# Altium PCB Memory_Expansion_Daughter_Board.PcbDoc
Units mm, origin at the board's own origin, x right, y up, seen from the top; angles counter-clockwise.
Board outline 63.5 x 43.5 mm, 2 copper layers (Top Layer, Bottom Layer), stack 1.671 mm thick; 45 components, 30 nets, 135 pads, 49 vias.
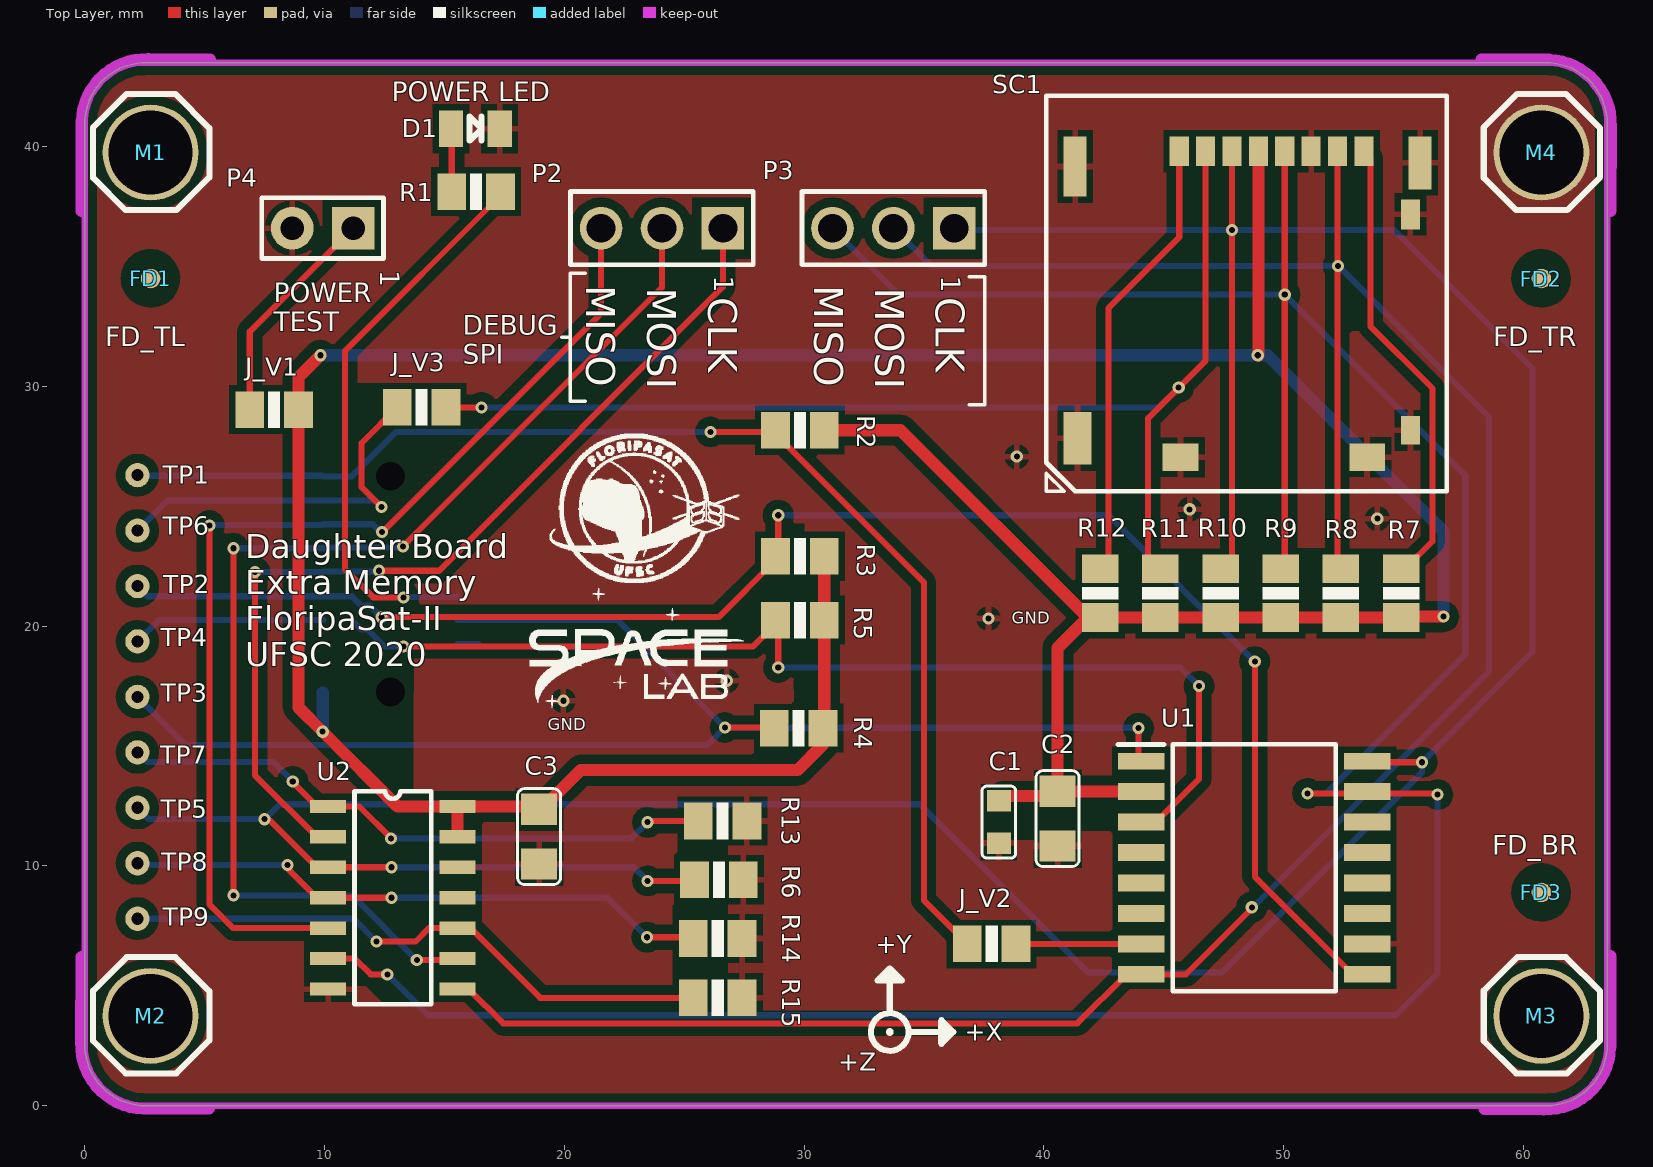
[diagram p0: Top Layer view]
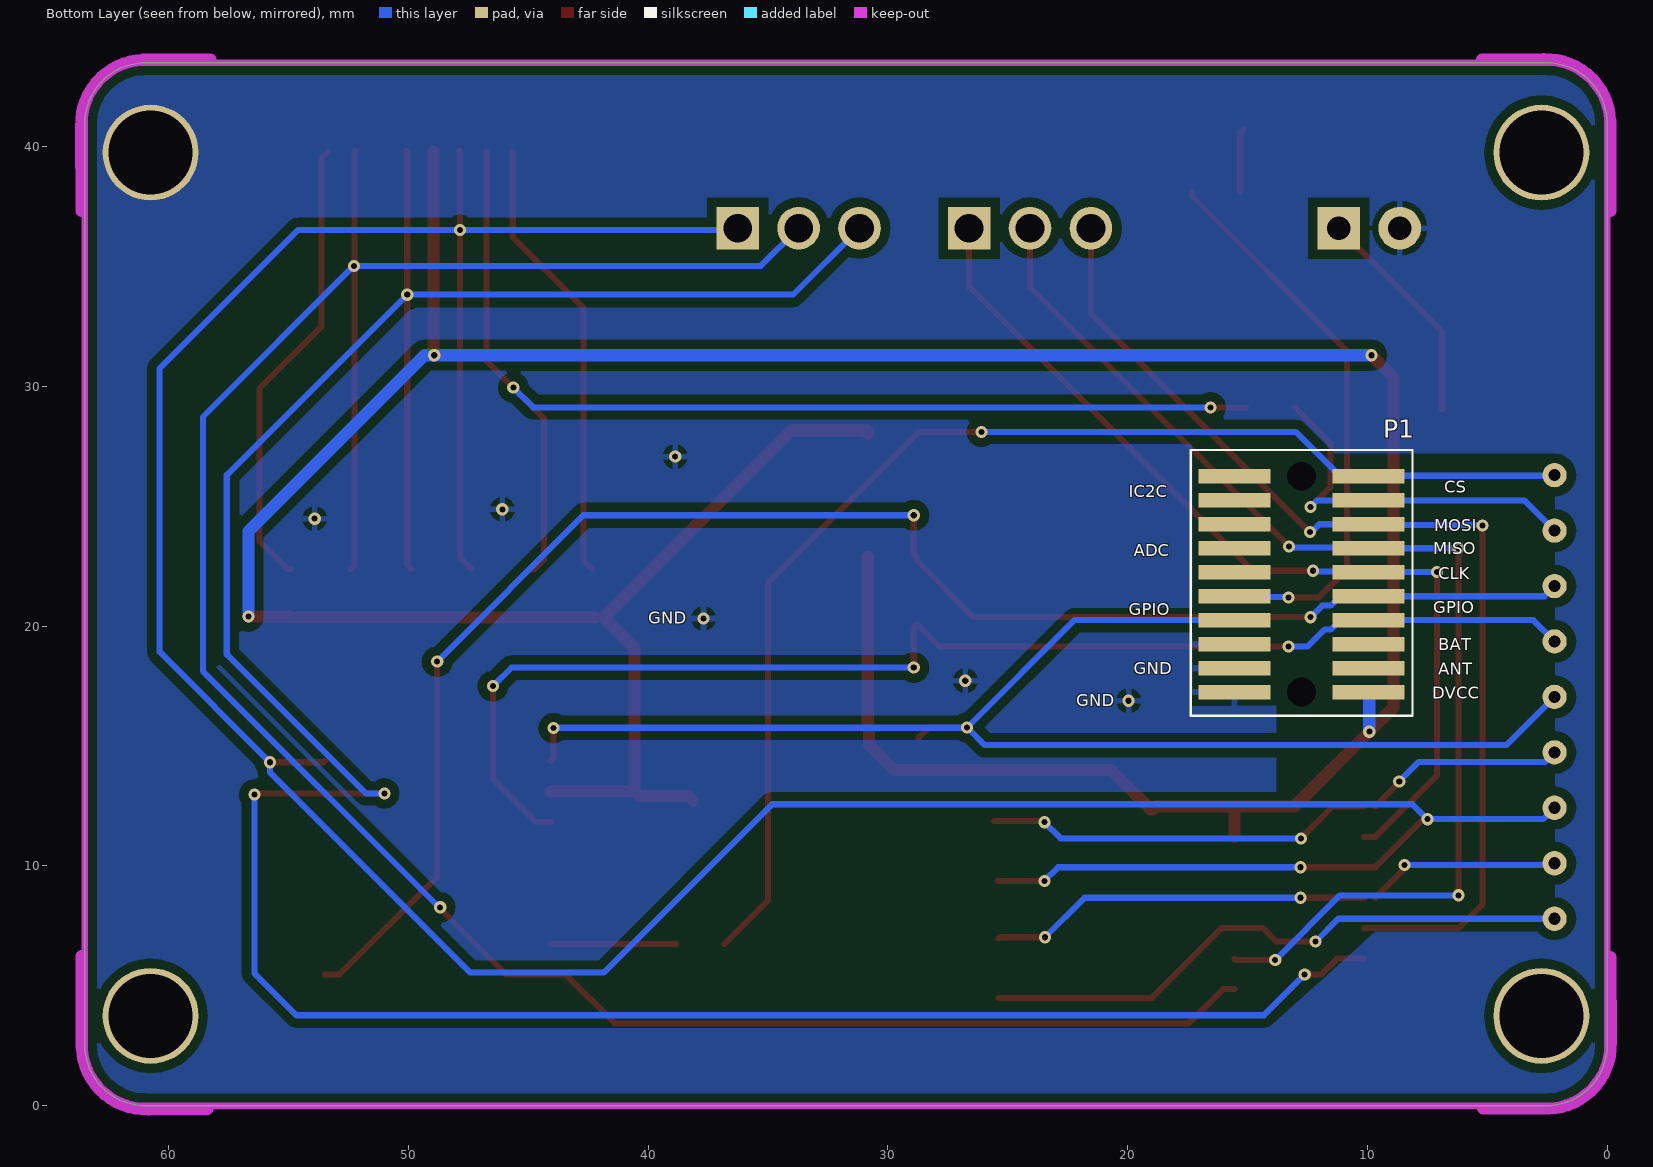
[diagram p1: Bottom Layer view, seen from below]
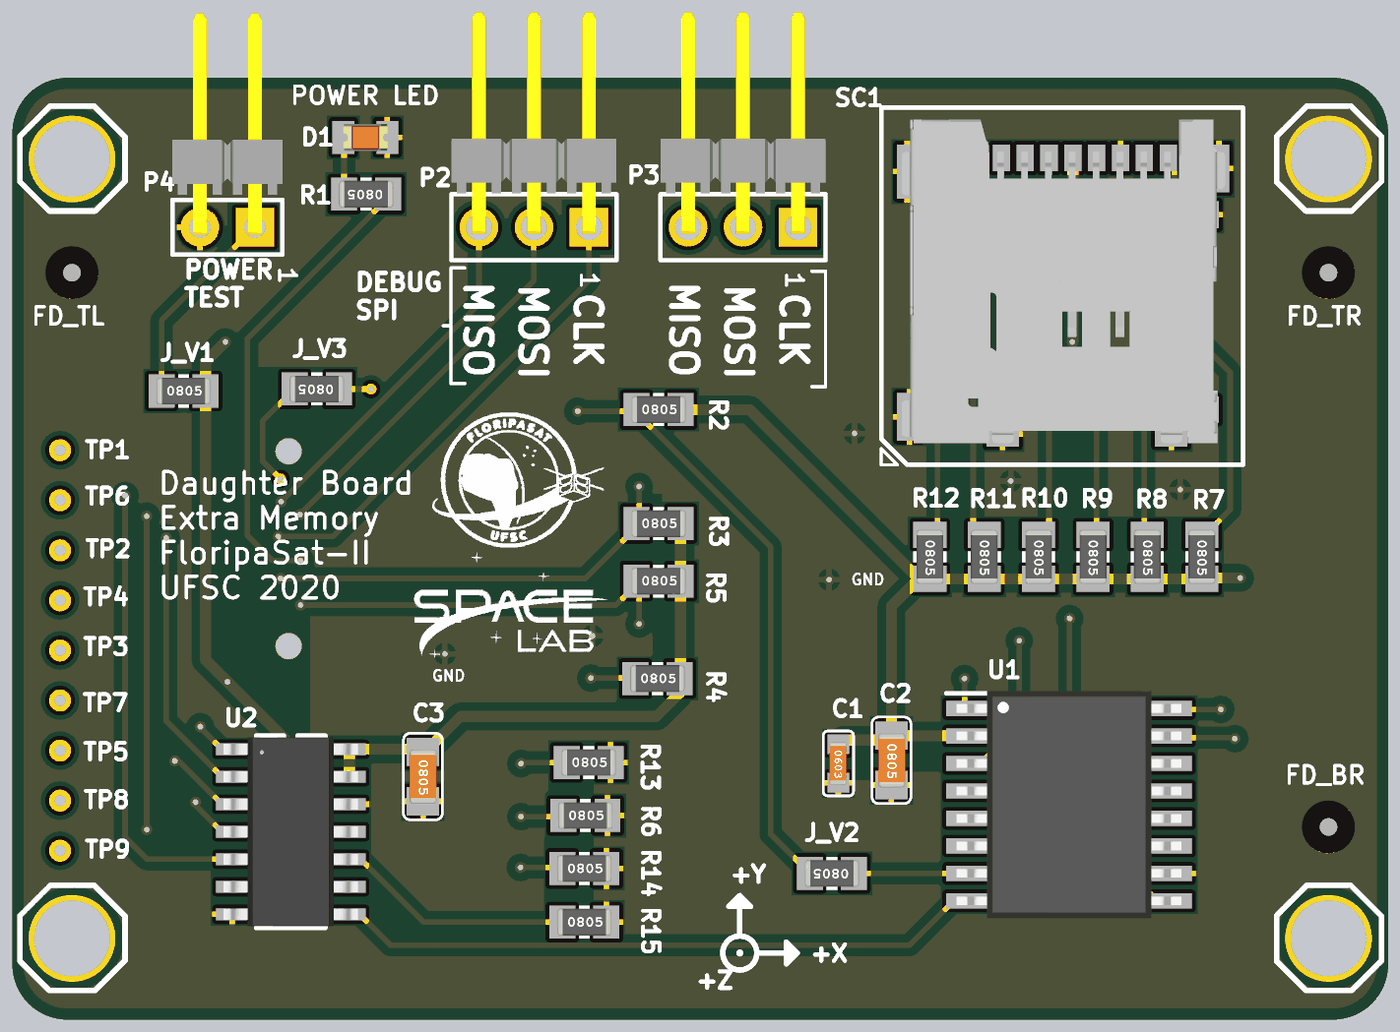
[diagram p2: 3D render of the assembled board from above, using the file's embedded part models]

## Layer stack, top to bottom
Top Solder: solder mask 0.0102, Solder Resist, Dk 3.5
Top Layer: signal copper 0.0356
Dielectric 1: dielectric 1.6, FR-4, Dk 4.8
Bottom Layer: signal copper 0.0356
Bottom Solder: solder mask 0.0102, Solder Resist, Dk 3.5

## Board outline
2.54,0 cw(c2.54,2.54) 0,2.54 0,2.8 0,40.85 0,40.96 cw(c2.54,40.96) 2.54,43.5 2.65,43.5 60.7,43.5 60.96,43.5 cw(c60.96,40.96) 63.5,40.96 63.5,40.7 63.5,2.8 63.5,2.54 cw(c60.96,2.54) 60.96,0

## Design rules (kind name [scope] priority, off if disabled: settings)
Clearance Clearance_1 [(ObjectKind = 'Pad') And (AsMM(X1) = 60.75) And (AsMM(Y1) = 39.75)] p1: gap=0.254 ignorepadtopadclearanceinfootprint=FALSE except(0: Arc-Hole Track-Hole SMDPad-Hole THPad-Hole Via-Hole Fill-Hole Poly-Hole Region-Hole Text-Hole)
Clearance Clearance_6 [InNet('GND')] p2: gap=0.381 ignorepadtopadclearanceinfootprint=FALSE except(0: Arc-Hole Track-Hole SMDPad-Hole THPad-Hole Via-Hole Fill-Hole Poly-Hole Region-Hole Text-Hole; 0.152: THPad-THPad; 0.178: Arc-SMDPad Arc-THPad Track-SMDPad Track-THPad SMDPad-SMDPad; 0.254: SMDPad-Fill SMDPad-Poly SMDPad-Region; 0.508: Arc-Arc Arc-Track Arc-Text Track-Track Track-Text SMDPad-Text Fill-Fill Fill-Poly Fill-Region Fill-Text Poly-Poly Poly-Region Poly-Text Region-Region Region-Text Text-Text)
Clearance [All] p3: gap=0.178 ignorepadtopadclearanceinfootprint=FALSE except(0: Arc-Hole Track-Hole SMDPad-Hole THPad-Hole Via-Hole Fill-Hole Poly-Hole Region-Hole Text-Hole)
DiffPairsRouting DiffPairsRouting_1 [InDifferentialPair('XT2')] p1: maxlimit=0.254 minlimit=0.254 mostfreqgap=0.254 toplayer_minwidth=0.254 toplayer_maxwidth=0.254 toplayer_prefwidth=0.254 bottomlayer_minwidth=0.254 bottomlayer_maxwidth=0.254 bottomlayer_prefwidth=0.254 maxuncoupledlength=12.7
DiffPairsRouting [All] p2: maxlimit=0.152 minlimit=0.152 mostfreqgap=0.152 toplayer_minwidth=0.457 toplayer_maxwidth=0.457 toplayer_prefwidth=0.457 bottomlayer_minwidth=0.457 bottomlayer_maxwidth=0.457 bottomlayer_prefwidth=0.457 maxuncoupledlength=12.7
HoleSize [All] p1: absolutevalues=TRUE maxlimit=5.08 minlimit=0.025 maxpercent=80.000 minpercent=20.000
MinimumSolderMaskSliver [All] p1: minsoldermaskwidth=0
PlaneConnect [InNetClass('power')] p1: planeconnectstyle=Direct reliefexpansion=0.508 reliefentries=4 reliefconductorwidth=0.254 reliefairgap=0.254
PlaneConnect PlaneConnect_1 [All] p2: planeconnectstyle=Relief reliefexpansion=0.508 reliefentries=4 reliefconductorwidth=0.254 reliefairgap=0.254
PolygonConnect [(ObjectKind = 'Pad') And (Layer = 'MultiLayer') And (Net = 'GND') And (Component = 'M4') And (AsMM(X1) = 60.75) And (AsMM(Y1) = 39.75)] p1: connectstyle=Direct reliefconductorwidth=0.254 reliefentries=4 polygonreliefangle="90 Angle" airgapwidth=0.254
PolygonConnect PolygonConnect_GND_pads [(ObjectKind = 'Pad') And (Net = 'GND')] p2: connectstyle=Relief reliefconductorwidth=0.254 reliefentries=4 polygonreliefangle="90 Angle" airgapwidth=0.254
RoutingVias [All] p1: holewidth=0.254 width=0.508 viastyle="Through Hole" minholewidth=0.127 minwidth=0.254 maxholewidth=0.254 maxwidth=0.635
SilkToSilkClearance [All] p1: silktosilkclearance=0.127
SilkToSolderMaskClearance [IsPad] p1: minsilkscreentomaskgap=0 clearancetoexposedcopper=TRUE
SolderMaskExpansion [All] p1: expansion=0.178
Width Width_Power [InNetClass('Power')] p1: maxlimit=0.762 minlimit=0.508 preferedwidth=0.508
Width [All] p2: maxlimit=1.778 minlimit=0.127 preferedwidth=0.254
24 further rules are at their usual default settings.

## Classes and differential pairs
component class U_3_Communication_Buffers: C3 R13 R14 R15 TP7 TP8 TP9 U2
component class U_2_Non_Volatile_Memories: C1 C2 J_V2 J_V3 R2 R3 R4 R5 R6 R7 R8 R9 R10 R11 R12 SC1 TP1 TP2 TP3 TP4 TP5 TP6 U1
component class 1_Interface: D1 FD1 FD2 FD3 J_V1 M1 M2 M3 M4 P1 P2 P3 P4 R1

## Components (designator, comment, footprint, x,y, rotation, side; value= is the part's Value field where it differs from the comment)
C1 "100nF/50V" C0603_MD 38.125,11.83 r270 top
C2 "4.7uF/25V" C0805_MD 40.575,11.975 r270 top
C3 "0.1uF/25V" C0805_MD 18.95,11.225 r270 top
D1 "Orange" 0805-LED 16.3,40.75 r0 top
FD1 "Fiducial" "FIDUCIAL 1.3MM" 2.75,34.5 r0 top
FD2 "Fiducial" "FIDUCIAL 1.3MM" 60.75,34.5 r0 top
FD3 "Fiducial" "FIDUCIAL 1.3MM" 60.75,8.897 r0 top
J_V1 "0R" 0805 7.899,29.032 r0 top
J_V2 "0R" 0805 37.825,6.75 r180 top
J_V3 "0R" 0805 14.05,29.125 r180 top
M1 "DB Mechanical Hole" "DB MECHANICAL HOLE" 2.75,39.75 r0 top
M2 "DB Mechanical Hole" "DB MECHANICAL HOLE" 2.75,3.75 r0 top
M3 "DB Mechanical Hole" "DB MECHANICAL HOLE" 60.75,3.75 r0 top
M4 "DB Mechanical Hole" "DB MECHANICAL HOLE" 60.75,39.75 r0 top
P1 "FSI-110-03-G-D-AD" "MATING FSI-110-03-G-D-AD" 12.75,21.75 r0 top
P2 "HEADER 3x" HEADER1X3 24.075,36.6 r270 top
P3 "HEADER 3x" HEADER1X3 33.725,36.6 r270 top
P4 "HEADER 2x" "HEADER 1X2" 9.925,36.6 r0 top
R1 "330R" 0805 16.325,38.125 r180 top
R2 "10k" 0805 29.825,28.175 r0 top
R3 "10k" 0805 29.825,22.912 r0 top
R4 "10k" 0805 29.775,15.75 r0 top
R5 "10k" 0805 29.825,20.256 r0 top
R6 "100k" 0805 26.45,9.425 r0 top
R7 "10k" 0805 54.9,21.375 r270 top
R8 "10k" 0805 52.39,21.375 r270 top
R9 "10k" 0805 49.88,21.375 r270 top
R10 "10k" 0805 47.37,21.375 r270 top
R11 "10k" 0805 44.86,21.375 r270 top
R12 "10k" 0805 42.35,21.375 r270 top
R13 "10k" 0805 26.6,11.875 r0 top
R14 "10k" 0805 26.4,6.975 r0 top
R15 "10k" 0805 26.4,4.5 r0 top
SC1 "WM12834CT-ND" USD_CARD 48.5,33.425 r180 top
TP1 "TEST_POINT_2" TEST_POINT_2 2.2,26.3 r90 top
TP2 "TEST_POINT_2" TEST_POINT_2 2.2,21.675 r90 top
TP3 "TEST_POINT_2" TEST_POINT_2 2.2,17.05 r90 top
TP4 "TEST_POINT_2" TEST_POINT_2 2.2,19.362 r90 top
TP5 "TEST_POINT_2" TEST_POINT_2 2.2,12.425 r90 top
TP6 "TEST_POINT_2" TEST_POINT_2 2.2,23.987 r90 top
TP7 "TEST_POINT_2" TEST_POINT_2 2.2,14.737 r180 top
TP8 "TEST_POINT_2" TEST_POINT_2 2.2,10.112 r180 top
TP9 "TEST_POINT_2" TEST_POINT_2 2.2,7.8 r180 top
U1 "MT25QL01GBBB8ESF-0SIT" SOIC127P1032X265-16N 48.775,9.925 r0 top
U2 "SN74LVC125APWR" SN74LVC125APWR 12.85,8.675 r0 top

## Footprints (in the part's own frame and the unit in brackets; to place one, negate y for a bottom-side part, rotate by r counter-clockwise, add the part's x,y. Pads: shape width x height; smd on the part's side, far side on the other; paste and mask are expansions set on the pad)
0805 [mil]
  rect 47.24x60 smd: 1(-40,0) 2(40,0)
  silkscreen extent -10,-30 10,30, body extent -49,-24 49,25, height 31
0805-LED [mil]
  rect 40x60 smd: 1(-40.35,0) 2(39.65,0)
  silkscreen extent -10,-20 10,20, body extent -40,-25 40,25, height 43
C0603_MD [mm] "Chip Capacitor, Body 1.6x0.8mm, IPC Medium Density"
  rect 0.9x1 smd: 1(-0.889,0) 2(0.889,0)
  silkscreen extent -1.5,-0.7 1.5,0.7, body extent -1,-0.41 1,0.38, height 0.79
C0805_MD [mm] "Chip Capacitor, Body 2.0x1.3mm, IPC Medium Density"
  rect 1.3x1.5 smd: 1(-1.143,0) 2(1.143,0)
  silkscreen extent -2,-0.9 2,0.9, body extent -1.25,-0.61 1.25,0.64, height 0.79
"DB MECHANICAL HOLE" [mm]
  round 4 hole 3.5 mask+0: 0(0,0)
"FIDUCIAL 1.3MM" [mil]
  round 32 smd: 1(0,0)
  Top Layer pour cut-out: -48.23,-6.89 -45.31,17.58 -30.69,37.43 -8.18,47.47 16.35,45.09 36.52,30.91 47.05,8.63 45.22,-15.95 31.5,-36.42 31.5,-36.42 8.41,-46.85 -16.81,-44.45 -37.51,-29.85 -48.23,-6.89
  Top Layer pour cut-out: 0.19,48.23
HEADER1X3 [mil]
  rect 70x70 hole 47.24: 1(0,100)
  round 70 hole 47.24: 2(0,0) 3(0,-100)
  silkscreen extent -60,-150 60,150, body extent -391,-150 11,150, height 120
"HEADER 1X2" [mil]
  rect 70x70 hole 39: 1(50,0)
  round 70 hole 39: 2(-50,0)
  silkscreen extent -100,-50 100,50, body extent -100,-13 100,389, height 120
"MATING FSI-110-03-G-D-AD" [mm]
  rect 3x0.61 smd far side: 1(-2.8,-4.5) 2(2.8,-4.5) 3(-2.8,-3.5) 4(2.8,-3.5) 5(-2.8,-2.5) 6(2.8,-2.5) 7(-2.8,-1.5) 8(2.8,-1.5) 9(-2.8,-0.5) 10(2.8,-0.5) 11(-2.8,0.5) 12(2.8,0.5) 13(-2.8,1.5) 14(2.8,1.5) 15(-2.8,2.5) 16(2.8,2.5) 17(-2.8,3.5) 18(2.8,3.5) 19(-2.8,4.5) 20(2.8,4.5)
  round 0 hole 1.2: AT(0,-4.5) AT(0,4.5)
SN74LVC125APWR [mm]
  rect 1.5x0.55 smd: 1(-2.7,3.81) 2(-2.7,2.54) 3(-2.7,1.27) 4(-2.7,0) 5(-2.7,-1.27) 6(-2.7,-2.54) 7(-2.7,-3.81) 8(2.7,-3.81) 9(2.7,-2.54) 10(2.7,-1.27) 11(2.7,0) 12(2.7,1.27) 13(2.7,2.54) 14(2.7,3.81)
  silkscreen extent -1.6,-4.44 1.6,4.44, body extent -3.1,-4.37 3.1,4.37, height 1.76
SOIC127P1032X265-16N [mm]
  rect 1.925x0.7 smd: 1(-4.712,4.445) 2(-4.712,3.175) 3(-4.712,1.905) 4(-4.712,0.635) 5(-4.712,-0.635) 6(-4.712,-1.905) 7(-4.712,-3.175) 8(-4.712,-4.445) 9(4.712,-4.445) 10(4.712,-3.175) 11(4.712,-1.905) 12(4.712,-0.635) 13(4.712,0.635) 14(4.712,1.905) 15(4.712,3.175) 16(4.712,4.445)
  silkscreen extent -5.68,-5.15 3.4,5.15, body extent -5.19,-5.25 5.19,5.25, height 2.8
TEST_POINT_2 [mil]
  round 40 hole 20: 1(0,0)
USD_CARD [mm]
  rect 0.8x1.24 smd: 1(2.85,-6.378) 2(1.75,-6.378) 3(0.65,-6.378) 4(-0.45,-6.378) 5(-1.55,-6.378) 6(-2.65,-6.378) 7(-3.75,-6.378) 8(-4.85,-6.378) 10(-6.79,-3.748)
  rect 0.95x2.2 smd: 10(-7.195,-5.898)
  rect 0.8x1.2 smd: 10(-6.79,5.252)
  rect 1.5x1.15 smd: 10(-4.99,6.378) 10(2.79,6.378)
  rect 1.15x2.2 smd: 10(7.095,5.582)
  rect 0.95x2.5 smd: 10(7.195,-5.748)
  silkscreen extent -8.3,-8.7 8.39,7.8, body extent -7.49,-8.16 7.45,6.79, height 1.43

## Part data
C1: library part Cap_Cer_X7R_100nF_50V_0603, "CAP CER 100nF 50V 0603 10%", Partnumber=C0603C104K5RAC3121, NCM=8532.24.10
C2: library part Cap_Cer_X7R_4.7uF_25V_0805, "CAP CER 4.7UF 25V 10% X7R 0805", Partnumber=C0805C475K3RACAUTO, NCM=8532.24.10
C3: library part Cap_Cer_X7R_0.1uF_25V_0805, "CAP CER 0.1UF 25V 10% X7R 0805", Partnumber=CC0805KRX7R8BB104, NCM=8532.24.10
D1: library part LED/R_0603, "SMD Orange LED", Partnumber=LTST-C170KFKT, NCM=8541.40.21
J_V1 J_V2 J_V3: library part R0R_JUMPER_1/16W_0805, "RES 0R OHM 1/16W JUMPER 0805", Partnumber=CRCW08050000Z0EA, NCM=8533.21.20
P2 P3: library part TSW-103-08-G-S-RA, "Conn Unshrouded Header HDR 3 POS 2.54mm Solder RA Thru-Hole Automotive Bulk", Color=Black, Manufacturer=Samtec, Max Current Rating=7.6A, Max Operating Temperature=125°C, Max Voltage Rating (AC)=450V, Min Operating Temperature=-55°C, Package Quantity=1, Supplier Part Number 1=SAM1039-03-ND, ComponentLink1Description=http://www.samtec.com/ftppub/pdf/htsw_th.pdf?src-supplier=Avnet+Europe, ComponentLink1URL=http://www.samtec.com/ftppub/pdf/htsw_th.pdf?src-supplier=Avnet+Europe, ComponentLink2Description=http://www.samtec.com/ftppub/pdf/htsw_th.pdf?src-supplier=Avnet, ComponentLink2URL=http://www.samtec.com/ftppub/pdf/htsw_th.pdf?src-supplier=Avnet, ComponentLink3Description=http://suddendocs.samtec.com/prints/tsw-xxx-xx-x-x-xx-xxx-footprint.pdf?src-supplier=Digi-Key, ComponentLink3URL=http://suddendocs.samtec.com/prints/tsw-xxx-xx-x-x-xx-xxx-footprint.pdf?src-supplier=Digi-Key, Connector Type="Male Pin", Contact Material=Bronze, Contact Mating Length=0.23inch, Contact Plating=Gold, Depth=9.9mm, Gender=Male, Housing Color=Black, Housing Material=Polyester, Lead Free="Lead Free", Length=7.62mm, Manufacturer Part Number=TSW-103-08-G-S-RA, Number of Contacts=3, Number of Positions=3, Number of Rows=1, Orientation="Right Angle", Packaging=Bulk, Pitch=2.54mm, Pricing 1="1=0.43, 10=0.403, 25=0.3456, 50=0.2938, 100=0.2822, 250=0.25344, 500=0.24192 (USD)", Radiation Hardening=No, REACH SVHC="No SVHC", Stock 1=2118, Supplier 1=Digi-Key, Termination=Solder, Width=2.54mm
P4: "Conn Unshrouded Header HDR 2 POS 2.54mm Solder RA Thru-Hole Automotive Bulk", Color=Black, Manufacturer=Samtec, Manufacturer Part Number=TSW-102-08-G-S-RA, Max Current Rating=7.6A, Max Operating Temperature=125°C, Max Voltage Rating (AC)=450V, Min Operating Temperature=-55°C, Package Quantity=1, Supplier Part Number 1=SAM1039-02-ND, ComponentLink1Description=http://www.samtec.com/ftppub/pdf/htsw_th.pdf?src-supplier=Avnet, ComponentLink1URL=http://www.samtec.com/ftppub/pdf/htsw_th.pdf?src-supplier=Avnet, ComponentLink2Description=http://suddendocs.samtec.com/prints/tsw-xxx-xx-x-x-xx-xxx-footprint.pdf?src-supplier=Digi-Key, ComponentLink2URL=http://suddendocs.samtec.com/prints/tsw-xxx-xx-x-x-xx-xxx-footprint.pdf?src-supplier=Digi-Key, Connector Type="Male Pin", Contact Material=Bronze, Contact Mating Length=0.23inch, Contact Plating=Gold, Depth=9.9mm, Gender=Male, Housing Color=Black, Housing Material=Polyester, Lead Free="Lead Free", Length=5.08mm, Number of Contacts=2, Number of Positions=2, Number of Rows=1, Orientation="Right Angle", Packaging=Bulk, Pitch=2.54mm, Pricing 1="1=0.28, 10=0.269, 25=0.2304, 50=0.1958, 100=0.1882, 250=0.16896, 500=0.16128 (USD)", Radiation Hardening=No, REACH SVHC="No SVHC", Stock 1=1298, Supplier 1=Digi-Key, Termination=Solder, Width=2.54mm
R1: library part R330R_1%_1/4W_0805, "RES 330R OHM 1/4W 1% 0805", Partnumber=RC0805FR-07330RL, NCM=8533.21.20
R2 R3 R4 R5 R7 R8 R9 R10 R11 R12 R13 R14 R15: library part R10k_1%_1/8W_0805, "RES 10K OHM 1/8W 1%  0805", Partnumber=CRCW080510K0FKEA, NCM=8533.21.20
R6: library part R100k_1%_1/8W_0805, "RES 100K OHM 1/8W 1% 0805", Partnumber=AC0805FR-13100KL, NCM=8533.21.20
SC1: library part MicroSD_Card_Connector, "MicroSD CARD Connector", NCM=8536.90.40, Partnumber=WM12834CT-ND
TP1 TP2 TP3 TP4 TP5 TP6 TP7 TP8 TP9: "Test point"
U1: "IC FLASH 1GBIT 108MHZ 16SOIC", Manufacturer_Name=Micron, Mouser Part Number=340-278808-TRAY, Datasheet Link=https://www.micron.com/~/media/documents/products/data-sheet/nor-flash/serial-nor/mt25q/die-rev-b/mt25q_qlkt_l_01g_bbb_0.pdf, Geometry.Height=2.65mm, Manufacturer_Part_Number=MT25QL01GBBB8ESF-0SIT, Mouser Price/Stock=https://www.mouser.com/Search/Refine.aspx?Keyword=340-278808-TRAY
U2: "IC BUF NON-INVERT 3.6V 14TSSOP", Case/Package=TSSOP, High Level Output Current=-24mA, Low Level Output Current=24mA, Manufacturer="Texas Instruments", Max Operating Temperature=125°C, Max Power Dissipation=500mW, Max Supply Voltage=3.6V, Min Operating Temperature=-40°C, Min Supply Voltage=1.65V, Package Quantity=1, Quiescent Current=1uA, Supplier Part Number 1=296-1222-1-ND, ComponentLink1Description=http://www.ti.com/lit/ds/symlink/sn74lvc125a.pdf?src-supplier=Digi-Key, ComponentLink1URL=http://www.ti.com/lit/ds/symlink/sn74lvc125a.pdf?src-supplier=Digi-Key, ComponentLink2Description=http://www.ti.com/general/docs/lit/getliterature.tsp?genericPartNumber=SN74LVC125A&&fileType=pdf&src-supplier=Avnet, ComponentLink2URL=http://www.ti.com/general/docs/lit/getliterature.tsp?genericPartNumber=SN74LVC125A&&fileType=pdf&src-supplier=Avnet, ComponentLink3Description=http://www.farnell.com/datasheets/1764352.pdf?src-supplier=Element14, ComponentLink3URL=http://www.farnell.com/datasheets/1764352.pdf?src-supplier=Element14, ComponentLink4Description=http://www.produktinfo.conrad.com/datenblaetter/1000000-1099999/001017107-da-01-en-IC_BUS_BUF_Q_SN74LVC125APWR_TSSOP_14_TID.pdf?src-supplier=Conrad, ComponentLink4URL=http://www.produktinfo.conrad.com/datenblaetter/1000000-1099999/001017107-da-01-en-IC_BUS_BUF_Q_SN74LVC125APWR_TSSOP_14_TID.pdf?src-supplier=Conrad, Contact Plating=Gold, Height=1.15mm, Lead Free="Lead Free", Length=5mm, Logic Function=Buffer,Inverting, Manufacturer Part Number=SN74LVC125APWR, Mount="Surface Mount", Number of Bits=4, Number of Bits per Element=1, Number of Channels=4, Number of Circuits=4, Number of Elements=4, Number of Gates=4, Number of Input Lines=4, Number of Inputs=4, Number of Output Lines=3, Number of Outputs=4, Number of Pins=14, Packaging="Tape and Reel", Polarity=Non-Inverting, Pricing 1="1=0.47, 10=0.352, 25=0.3172, 100=0.2192, 250=0.18456, 500=0.14996, 1000=0.11536 (USD)", Propagation Delay=4.6ns, Radiation Hardening=No, REACH SVHC="No SVHC", Stock 1=45045, Supplier 1=Digi-Key, Termination=SMD/SMT, Turn-On Delay Time=5.3ns, Width=4.4mm
P1: Partnumber=FSI-110-03-G-D-AD, System=Connector

## Via types
v1: diameter 0.508, hole 0.254, Top Layer to Bottom Layer, tented both sides, 47 vias
v2: diameter 0.508, hole 0.254, Top Layer to Bottom Layer, 2 vias

## Nets (pads, with @x,y where several pads share a name; then routed paths per layer and width w, separated by ;. In a path a pad name is that pad's centre, name@x,y a point inside that pad or via, vN(x,y) a via of type N, cw(c..) or ccw(c..) an arc to the next point about the centre after c; other vN are vias at no path point)
"ANTENNA VCC": P1.3
"BATTERY VCC": P1.5
CLK_EN: R13.1 TP7.1 U2.1 | length 24.8
  Top Layer w0.254: v1(8.675,13.525) 8.675,13.485 9.675,12.485 U2.1@9.715,12.485 ; U2.1 11.44,12.485 v1(12.775,11.15) ; v1(23.475,11.825) 23.525,11.875 R13.1
  Bottom Layer w0.254: TP7.1 2.595,14.343 7.857,14.343 v1(8.675,13.525) ; v1(12.775,11.15) 22.8,11.15 v1(23.475,11.825)
"D BOARD ADC0": P1.12
"D BOARD ADC1": P1.14
"D BOARD ADC2": P1.16
"D BOARD GPIO0": P1.7 R5.1 TP4.1 U1.3 | length 53.4
  Top Layer w0.254: v1(13.3,19.15) 27.865,19.15 28.809,20.094 28.925,19.978 v1(28.925,18.275) ; U1.3 44.676,11.83 46.475,13.629 v1(46.475,17.5)
  Bottom Layer w0.254: TP4.1 3.088,20.25 P1.7 ; P1.7@11.145,20.25 11.535,19.86 11.8,19.86 12.51,19.15 v1(13.3,19.15) ; v1(28.925,18.275) 45.7,18.275 v1(46.475,17.5)
"D BOARD GPIO1": P1.8 R4.1 TP3.1 U1.1 | length 59.5
  Top Layer w0.254: v1(26.7,15.775) 28.286,15.775 R4.1@28.734,15.327 ; v1(43.95,15.75) 43.95,14.483 U1.1
  Bottom Layer w0.254: TP3.1 4.209,15.041 4.35,15.041 25.966,15.041 v1(26.7,15.775) 22.225,20.25 P1.8 ; v1@26.7,15.75 26.713,15.763 43.937,15.763 v1(43.95,15.75)
"D BOARD GPIO2": P1.9 R3.1 TP2.1 U1.9 | length 67.8
  Top Layer w0.254: v1(12.375,20.375) 26.434,20.375 28.809,22.75 R3.1 28.925,23.028 v1(28.925,24.625) ; v1(48.8,18.525) 48.8,9.554 52.874,5.48 U1.9
  Bottom Layer w0.254: TP2.1 2.625,21.25 P1.9 11.145,21.25 11.535,20.86 11.89,20.86 v1(12.375,20.375) ; v1(28.925,24.625) 42.7,24.625 v1(48.8,18.525)
"D BOARD GPIO3": P1.10 R1.1 | length 23.6
  Top Layer w0.254: v1(13.3,21.2) 12.025,21.2 10.85,22.375 10.85,31.472 17.341,37.963 R1.1
  Bottom Layer w0.254: v1(13.3,21.2) 13.325,21.225 15.525,21.225 P1.10
"D BOARD SPI CS0": J_V3.2 P1.17 TP6.1 | length 15.9
  Top Layer w0.254: v2(12.375,24.975) 11.55,25.8 11.55,27.641 J_V3.2
  Bottom Layer w0.254: TP6.1 3.463,25.25 P1.17 12.1,25.25 v2(12.375,24.975)
"D BOARD SPI CS1": J_V2.2 P1.19 R2.1 TP1.1 | length 52
  Top Layer w0.254: v1(26.1,28.1) 28.734,28.1 28.734,28.088 34.997,21.825 34.997,8.562 J_V2.2
  Bottom Layer w0.254: TP1.1 2.225,26.275 9.925,26.275 P1.19 11.145,26.25 12.995,28.1 v1(26.1,28.1)
GND: C1.2 C2.2 C3.2 D1.2 M4.0 P1.2 P1.4 P1.6 P4.2 R6.2 R13.2 R14.2 R15.2 SC1.6 SC1.10 U1.10 U2.7 U2.12 | length 0.9
  Bottom Layer w0.254: P1.6 P1.6@16.412,19.25
  other v1: 19.964,16.891 26.775,17.725 37.694,20.32 53.909,24.484 46.083,24.875 38.875,27.075
"I2C2 SCL BUF": P1.20
"I2C2 SDA BUF": P1.18
MISO_EN: R15.1 TP9.1 U2.10 | length 25
  Top Layer w0.254: v1(12.162,6.85) 13.8,6.85 14.355,7.405 U2.10 16.095,7.405 19,4.5 R15.1
  Bottom Layer w0.254: TP9.1 11.212,7.8 v1(12.162,6.85)
MOSI_EN: R14.1 TP8.1 U2.4 | length 24
  Top Layer w0.254: v1(8.457,10.043) 8.506,9.994 8.506,9.844 U2.4@9.675,8.675 ; U2.4 v1(12.8,8.675) ; v1(23.45,7.025) 25.334,7.025 R14.1
  Bottom Layer w0.254: TP8.1@2.275,10.043 v1(8.457,10.043) ; v1(12.8,8.675) 21.8,8.675 v1(23.45,7.025)
NetD1_1: D1.1 R1.2 | length 2.7
  Top Layer w0.254: D1.1@15.15,40.75 15.309,40.591 R1.2
NetJ_V1_1: J_V1.1 P4.1 | length 9.4
  Top Layer w0.254: J_V1.1 6.883,32.288 P4.1
NetJ_V2_1: J_V2.1 U1.7 | length 5.2
  Top Layer w0.254: J_V2.1 U1.7
NetJ_V3_1: J_V3.1 R11.1 SC1.2 | length 49.6
  Top Layer w0.254: J_V3.1 v2(16.55,29.125) ; R11.1 44.723,22.391 44.35,22.764 44.35,28.675 v1(45.625,29.95) 46.75,31.075 SC1.2
  Bottom Layer w0.254: v2(16.55,29.125) 44.8,29.125 v1(45.625,29.95)
NetR7_1: R7.1 SC1.8 | length 19.2
  Top Layer w0.254: SC1.8 53.623,39.53 53.623,32.503 56.21,29.915 56.21,23.539 55.062,22.391 R7.1
NetR12_1: R12.1 SC1.1 | length 18.8
  Top Layer w0.254: R12.1 42.7,22.741 42.7,33.275 45.65,36.225 SC1.1
"OBDH 3V3DVCC": C1.1 C2.1 C3.1 J_V1.2 P1.1 R2.2 R3.2 R4.2 R5.2 R7.2 R8.2 R9.2 R10.2 R11.2 R12.2 SC1.4 U1.2 U2.13 U2.14 | length 155.3
  Top Layer w0.508: v1(9.83,31.3) 8.915,30.386 J_V1.2 8.915,16.61 v1(9.925,15.6) 13.04,12.485 U2.14 ; U2.13 U2.14 ; R3.2 R5.2 30.841,15.8 R4.2 30.791,15.061 29.733,14.003 20.685,14.003 19.05,12.368 C3.1 18.833,12.485 U2.14 ; R2.2 30.841,28.013 31.001,28.173 34.027,28.173 41.841,20.359 40.575,19.093 C2.1 ; C1.1 38.321,12.915 40.372,12.915 C2.1 ; R12.2@42.188,20.359 R12.2 R11.2 R10.2 R9.2 R8.2 R7.2 54.941,20.4 v1(56.675,20.4) ; U1.2 44.054,13.109 40.584,13.109 C2.1 ; v1@48.95,31.3 SC1.4
  Bottom Layer w0.254: P1.1@9.925,17.225 P1.1
  Bottom Layer w0.508: v1@9.9,31.3 v1(48.923,31.3) 49.325,31.3 56.675,23.95 v1(56.675,20.4) ; v1(9.925,15.6) P1.1@9.925,17.225
SPI_B\U\F\F\_CLK: P1.11 P2.1 U2.2 | length 39.5
  Top Layer w0.254: v1(7.1,22.255) 7.1,13.79 9.675,11.215 U2.2 ; v1(12.275,22.314) 14.779,22.314 26.615,34.15 P2.1
  Bottom Layer w0.254: v1@7.105,22.25 7.107,22.252 9.948,22.252 P1.11 9.982,22.282 12.243,22.282 v1(12.275,22.314)
SPI_B\U\F\F\_MISO: P1.13 P2.2 U2.9 | length 49.8
  Top Layer w0.254: v1(6.2,8.775) v1(6.2,23.25) ; v1(13.275,23.325) 24.075,34.125 P2.2 ; v1(13.85,6.075) 15.49,6.075 U2.9
  Bottom Layer w0.254: v1(6.2,8.775) 11.15,8.775 v1(13.85,6.075) ; v1(6.2,23.25) P1.13 9.988,23.287 13.237,23.287 v1(13.275,23.325)
SPI_B\U\F\F\_MOSI: P1.15 P2.3 U2.5 | length 44.9
  Top Layer w0.254: v1(5.2,24.2) 5.2,8.405 6.2,7.405 U2.5 ; v1(12.4,23.925) 21.535,33.06 P2.3
  Bottom Layer w0.254: v1@5.25,24.25 5.275,24.225 9.925,24.225 P1.15 12.006,24.25 12.331,23.925 v1(12.4,23.925)
SPI_BUFF_CLK: P3.1 R6.1 R10.1 SC1.3 TP5.1 U1.16 U2.3 | length 144.6
  Top Layer w0.254: v1(7.5,11.95) 7.549,11.901 7.719,11.901 9.675,9.945 U2.3 v1(12.795,9.945) ; v1(23.475,9.375) R6.1@25.434,9.375 ; R10.1 47.377,22.391 47.85,22.864 SC1.3 SC1.3@47.875,39.827 ; U1.16 53.532,14.325 v1(55.775,14.325)
  Bottom Layer w0.254: TP5.1 2.675,11.95 v1(7.5,11.95) 8.125,12.575 34.825,12.575 41.85,5.55 47.425,5.55 55.775,13.9 v1(55.775,14.325) 60.375,18.925 60.375,30.75 54.6,36.525 v1(47.85,36.525) 36.34,36.525 P3.1 ; v1(12.795,9.945) 22.905,9.945 v1(23.475,9.375)
SPI_BUFF_MISO: P3.2 R8.1 SC1.7 U1.8 U2.8 | length 105.9
  Top Layer w0.254: U2.8 16.025,4.865 17.457,3.433 41.404,3.433 43.45,5.48 U1.8 45.93,5.48 48.675,8.225 v1(48.675,8.275) ; SC1.7@52.225,39.828 SC1.7 52.25,22.531 R8.1
  Bottom Layer w0.254: P3.2 35.3,35.025 v1(52.275,35.025) 58.575,28.725 58.575,18.125 48.725,8.275 v1(48.675,8.275)
SPI_BUFF_MOSI: P3.3 R9.1 SC1.5 U1.15 U2.6 | length 125.6
  Top Layer w0.254: U2.6 11.265,6.135 11.925,5.475 v1(12.62,5.475) ; R9.1 50.05,22.561 SC1.5 SC1.5@50.075,39.827 ; v1(51,13.025) 53.412,13.025 53.45,13.063 53.487,13.025 53.487,12.975 53.536,13.024 56.376,13.024 v1(56.425,12.975)
  Bottom Layer w0.254: v1(12.62,5.475) 14.32,3.775 54.675,3.775 56.425,5.525 v1(56.425,12.975) ; P3.3 33.96,33.825 v1(50.05,33.825) 57.575,26.3 57.575,18.825 51.775,13.025 v1(51,13.025)
pads on no net: FD1.1 FD2.1 FD3.1 M1.0 M2.0 M3.0 P1.AT U1.4 U1.5 U1.6 U1.11 U1.12 U1.13 U1.14 U2.11

## Polygon pours and split planes (outlines as drawn)
no net on Mechanical 1 (solid): 3,42.2
GND on Top Layer "Top Layer-GND" (solid, remove dead copper, pour order 14): 0,40.85 cw(c2.65,40.85) 2.65,43.5 60.825,43.5 cw(c60.825,40.825) 63.5,40.825 63.5,2.65 cw(c60.85,2.65) 60.85,0 2.65,0 cw(c2.65,2.65) 0,2.65
no net on Top Layer "Top Layer-No Net" (solid, pour order 10): -6.675,21.45
GND on Bottom Layer "Bottom Layer-GND" (solid, remove dead copper, pour order 16): 0,40.706 cw(c2.794,40.706) 2.794,43.5 60.706,43.5 cw(c60.706,40.706) 63.5,40.706 63.5,2.794 cw(c60.706,2.794) 60.706,0 2.794,0 cw(c2.794,2.794) 0,2.794

## Keep-outs
Keep-Out Layer:
  lines w0.254: 0,2.54 ccw(c2.54,2.54) 2.54,0 60.96,0 ccw(c60.96,2.54) 63.5,2.54 63.5,40.96 ccw(c60.96,40.96) 60.96,43.5 2.54,43.5 ccw(c2.54,40.96) 0,40.96 0,38.525 0,2.54
  lines w0.5: -0.125,6.2 -0.15,2.65 ccw(c2.532,2.558) 2.44,-0.125 5.175,-0.125 ; -0.125,37.325 -0.125,41.06 cw(c2.558,40.967) 2.65,43.65 5.225,43.632 ; 58.25,43.625 61.06,43.625 cw(c60.968,40.942) 63.65,40.85 63.625,37.325 ; 58.375,-0.133 60.85,-0.15 ccw(c60.942,2.532) 63.625,2.44 63.625,6.25

## Other copper
Top Layer:
  pour cut-out: 7.401,30.048 7.4,30.047 7.4,28.025 8.259,28.025 8.268,28.016 8.268,30.048
  pour cut-out: 15.92,30.141 15.734,29.955 15.734,27.992 13.849,26.106 13.069,26.106 11.368,27.807 11.368,30.15
  pour cut-out: 13.739,17.25 13.733,17.243 13.733,13.132 13.308,13.132 9.563,16.878 9.563,30.117 10.32,30.875 10.332,30.875 10.332,22.523 13.739,19.116
  pour cut-out: 41.579,12.462 41.579,11.464 41.593,11.45 42.847,11.45 42.847,12.434 42.819,12.462
  pour cut-out: 39.571,11.645 39.571,11.068 38.879,11.068 38.879,11.645
  pour cut-out: 39.571,10.959
  pour cut-out: 38.879,11.645 38.879,11.068 38.994,11.068 39.571,11.645
  pour cut-out: 37.371,12.015 37.371,11.645 39.8,11.645 40.045,11.4 41.243,11.4 41.579,11.736 41.579,12.214 39.625,12.214 39.571,12.268 38.879,12.268 38.879,12.015
  pour cut-out: 37.663,7.766 37.987,7.766 37.987,5.734 37.663,5.734
  pour cut-out: 24.53,5.516 26.238,5.516 26.238,10.391 26.321,10.474 26.321,10.81 26.272,10.859 24.73,10.859 24.73,10.591 24.58,10.441 24.58,8.409 24.53,8.359
  pour cut-out: 24.475,13.35
  pour cut-out: 26.238,3.951 26.562,3.951 26.562,4.373 26.823,4.373 26.825,4.375 26.825,12.828 26.762,12.891 26.438,12.891 26.438,10.859 26.288,10.709 26.288,8.409 26.238,8.359
  pour cut-out: 11.154,4.992 11.727,4.996 12.387,4.336 14.546,4.336 14.546,5.394 16.554,5.394 16.554,5.068 17.671,3.951 18.678,3.951 18.717,4.078 16.671,6.096 16.554,6.048 16.554,5.606 13.42,5.606 13.359,5.667 13.309,5.618 13.239,5.618 13.239,5.248 12.868,4.877 12.788,4.957 11.727,4.996 11.281,5.387 11.154,5.334
  pour cut-out: 9.146,5.606 9.146,5.394 10.023,5.394 10.023,5.127 10.277,5.125 10.277,5.394 11.094,5.394 11.147,5.521 11.062,5.606
  pour cut-out: 6.845,13.313 6.792,13.26 6.718,13.26 6.718,9.143 6.34,8.765 6.34,8.071 6.304,8.034 6.415,7.923 11.143,7.923 11.154,7.934 11.154,6.876 9.146,6.876 9.146,6.664 11.387,6.664 11.431,6.62 11.525,6.714 11.876,6.714 12.53,7.368 13.8,7.368 14.366,7.934 16.554,7.934 16.554,8.146 14.546,8.146 14.546,9.204 16.554,9.204 16.554,9.416 15.677,9.416 15.677,9.664 15.688,9.675 15.423,9.675 15.423,9.416 14.546,9.416 14.546,9.818 14.8,9.818 14.8,10.072 14.546,10.072 14.546,11.744 14.465,11.825 14.465,11.838 13.118,11.838 13.079,11.799 13.079,8.108 13.048,8.077 12.968,8.157 9.46,8.157 8.033,9.585 7.999,9.585 7.999,10.459 8.141,10.6 8.141,10.747 6.902,11.986 6.902,12.198 7.02,12.198 7.442,12.619 7.442,12.715
  pour cut-out: 29.613,14.965 29.613,16.766 29.572,16.807 29.523,18.523 29.443,18.643 29.443,19.24 29.663,19.24 29.663,21.272 28.229,21.272 28.181,21.321 28.181,21.39 28.687,21.896 29.663,21.896 29.663,23.928 29.443,23.928 29.443,24.257 29.461,24.275 30,24.275 30,23.941 29.987,23.928 29.987,21.896 30.194,21.896 30.194,21.272 29.987,21.272 29.987,19.24 30.194,19.24 30.194,16.766 29.937,16.766 29.937,15.123 29.73,14.916
  pour cut-out: 55.916,21.537 55.916,21.213 53.884,21.213 53.884,21.006 53.406,21.006 53.406,21.213 51.374,21.213 51.374,21.006 50.896,21.006 50.896,21.213 48.864,21.213 48.864,21.006 48.386,21.006 48.386,21.213 46.354,21.213 46.354,21.006 45.876,21.006 45.876,21.213 43.844,21.213 43.844,21.006 43.366,21.006 43.366,21.213 41.903,21.213 41.696,21.42 41.745,21.468 41.745,21.537 43.366,21.537 43.366,23.245 43.218,23.245 43.218,33.06 46.105,35.948 46.105,35.992 46.194,35.992 46.232,35.953 46.232,31.29 43.9,28.957 43.9,21.662 44.025,21.537 45.876,21.537 45.876,23.245 46.354,23.245 46.354,21.537 48.368,21.537 48.368,30.776 48.414,30.822 49.387,30.822 49.405,30.84 49.436,30.809 49.532,30.809 49.532,23.245 48.864,23.245 48.864,21.537 50.896,21.537 50.896,23.245 51.374,23.245 51.374,21.537 53.406,21.537 53.406,23.245 53.884,23.245 53.884,21.537
  pour cut-out: 52.768,38.929 53.105,38.929 53.105,32.344 53.144,32.304 53.14,32.3 52.768,32.3
  pour cut-out: 14.546,10.686 16.554,10.686 16.554,10.474 14.546,10.474
  pour cut-out: 29.663,29.191 29.987,29.191 29.987,27.733 29.87,27.685 29.663,27.891
  pour cut-out: 16.163,39.141 16.487,39.141 16.487,37.841 16.28,37.635 16.163,37.683 16.163,37.696
  region: 0,43.5
  region: -0.1,43.5
Bottom Layer:
  pour cut-out: 17.304,26.809 12.848,26.809 12.852,27.582 17.3,27.582
  pour cut-out: 13.954,3.409 9.675,7.282 11.635,7.96 14.973,4.623
  pour cut-out: 2.2,27.197 13.796,27.197 13.796,7.8 2.2,7.8
  pour cut-out: 10.972,26.809
  pour cut-out: 7,12.425
  pour cut-out: 11.831,16.905 11.729,16.905 11.515,16.691 10.572,16.691 10.572,15.669 10.692,15.55 13.796,15.55 13.796,16.88 11.856,16.88

## Silkscreen, mask and mechanical layers (free items; w line width, h text height)
Top Overlay:
  drawing of 1615 lines, arcs and shapes, not listed
  text "POWER LED" at 12.8,41.9 h0.8
  text "1" at 12.325,34.85 h0.8 r270
  text "1" at 26.254,34.625 h0.8 r270
  text "1" at 35.725,34.625 h0.8 r270
  text "FD_TL" at 0.85,31.675 h0.8
  text "FD_TR" at 58.75,31.675 h0.8
  text "GND" at 38.659,20.091 h0.5
  text "Daughter Board / Extra Memory / FloripaSat-II / UFSC 2020" at 6.7,18.325 h1
  text "GND" at 19.309,15.65 h0.5
  text "FD_BR" at 58.7,10.475 h0.8
  text "+Y" at 33,6.35 h0.76
  text "+X" at 36.7,2.7 h0.76
  text "+Z" at 31.425,1.45 h0.76
Bottom Overlay:
  text "GND" at 40.005,20.091 h0.5
  text "GND" at 22.149,16.662 h0.5
Board Outline:
  lines w0.254: 0,2.54 ccw(c2.54,2.54) 2.54,0 60.96,0 ccw(c60.96,2.54) 63.5,2.54 63.5,40.96 ccw(c60.96,40.96) 60.96,43.5 2.54,43.5 ccw(c2.54,40.96) 0,40.96 0,38.525 0,2.54
ASM Top:
  lines w0.1: 40.105,25.625 40.107,25.627
  lines w0.15: 40.105,25.625 40.105,26.375 ; 40.105,26.37 40.848,25.627 40.107,25.627
  text "U1" at 46.475,14.225 h0.5
  text "C2" at 40.15,13 h0.5
  text "C1" at 37.8,12.475 h0.5
  text "C3" at 18.525,12.225 h0.5
Sheet:
  drawing of 1205 lines, arcs and shapes, not listed
  text "Layer" at 96.373,58.944 h1.52
  text "Name" at 106.784,58.944 h1.52
  text "Material" at 130.4,58.944 h1.52
  text "Thickness" at 152.238,58.944 h1.52
  text "Constant" at 168.744,58.944 h1.52
  text "Board Layer Stack" at 183.218,58.944 h1.52
  text "Board Layer Stack" at 211.658,58.944 h1.52
  text "Board Layer Stack" at 240.098,58.944 h1.52
  text "Board Layer Stack" at 268.538,58.944 h1.52
  text "Board Layer Stack" at 296.978,58.944 h1.52
  text "Board Layer Stack" at 325.418,58.944 h1.52
  text "Board Layer Stack" at 353.858,58.944 h1.52
  text "1" at 96.373,55.896 h1.52
  text "Top Overlay" at 106.784,55.896 h1.52
  text "2" at 96.373,52.848 h1.52
  text "Top Solder" at 106.784,52.848 h1.52
  text "Solder Resist" at 130.4,52.848 h1.52
  text "0,40mil" at 152.238,52.848 h1.52
  text "3,5" at 168.744,52.848 h1.52
  text "3" at 96.373,49.8 h1.52
  text "Top Layer" at 106.784,49.8 h1.52
  text "Copper" at 130.4,49.8 h1.52
  text "1,40mil" at 152.238,49.8 h1.52
  text "4" at 96.373,46.752 h1.52
  text "Dielectric 1" at 106.784,46.752 h1.52
  text "FR-4" at 130.4,46.752 h1.52
  text "62,99mil" at 152.238,46.752 h1.52
  text "4,8" at 168.744,46.752 h1.52
  text "5" at 96.373,43.704 h1.52
  text "Bottom Layer" at 106.784,43.704 h1.52
  text "Copper" at 130.4,43.704 h1.52
  text "1,40mil" at 152.238,43.704 h1.52
  text "6" at 96.373,40.656 h1.52
  text "Bottom Solder" at 106.784,40.656 h1.52
  text "Solder Resist" at 130.4,40.656 h1.52
  text "0,40mil" at 152.238,40.656 h1.52
  text "3,5" at 168.744,40.656 h1.52
  text "7" at 96.373,37.608 h1.52
  text "Bottom Overlay" at 106.784,37.608 h1.52
Drill Drawing:
  circle w0.254: c97.208,8.862 r0.847
  lines w0.254: 96.362,4.205 97.208,4.628 98.055,4.205 97.632,5.052 98.055,5.898 97.208,5.475 96.362,5.898 96.785,5.052 96.362,4.205 ; 96.362,13.518 98.055,13.518 97.208,11.825 96.362,13.518 ; 96.362,15.635 98.055,15.635 98.055,17.328 96.362,17.328 96.362,15.635 ; 96.362,19.868 96.785,19.868 97.208,19.445 97.632,19.868 98.055,19.868 97.632,20.292 98.055,20.715 97.632,20.715 97.208,21.138 96.785,20.715 96.362,20.715 96.785,20.292 96.362,19.868
  lines w0.381: 94.843,3.062 366.903,3.062 ; 94.843,22.112 366.903,22.112 ; 108.835,-0.748 108.835,25.922 ; 122.548,-0.748 122.548,25.922 ; 152.257,-0.748 152.257,25.922 ; 165.106,-0.748 165.106,25.922 ; 183.745,-0.748 183.745,25.922 ; 221.833,-0.748 221.833,25.922 ; 236.816,-0.748 236.816,25.922 ; 255.759,-0.748 255.759,25.922 ; 276.327,-0.748 276.327,25.922 ; 298.013,-0.748 298.013,25.922 ; 331.886,-0.748 331.886,25.922 ; 94.843,-0.748 366.903,-0.748 366.903,25.922 94.843,25.922 94.843,-0.748
  text "Symbol" at 97.129,23.255 h1.83
  text "Count" at 109.978,23.255 h1.83
  text "Hole Size" at 123.691,23.255 h1.83
  text "Plated" at 153.4,23.255 h1.83
  text "Hole Type" at 166.249,23.255 h1.83
  text "Drill Layer Pair" at 184.888,23.255 h1.83
  text "Via/Pad" at 222.976,23.255 h1.83
  text "Pad Shape" at 237.959,23.255 h1.83
  text "Template" at 256.902,23.255 h1.83
  text "Description" at 277.47,23.255 h1.83
  text "Hole Tolerance (+)" at 299.156,23.255 h1.83
  text "Hole Tolerance (-)" at 333.029,23.255 h1.83
  text "2" at 109.978,19.445 h1.52
  text "0,991mm (39,00mil)" at 123.691,19.445 h1.52
  text "PTH" at 153.4,19.445 h1.52
  text "Round" at 166.249,19.445 h1.52
  text "Top Layer - Bottom Layer" at 184.888,19.445 h1.52
  text "Pad" at 222.976,19.445 h1.52
  text "(Mixed)" at 237.959,19.445 h1.52
  text "(Mixed)" at 256.902,19.445 h1.52
  text "4" at 109.978,15.635 h1.52
  text "3,500mm (137,79mil)" at 123.691,15.635 h1.52
  text "PTH" at 153.4,15.635 h1.52
  text "Round" at 166.249,15.635 h1.52
  text "Top Layer - Bottom Layer" at 184.888,15.635 h1.52
  text "Pad" at 222.976,15.635 h1.52
  text "Rounded" at 237.959,15.635 h1.52
  text "c400h350m400" at 256.902,15.635 h1.52
  text "8" at 109.978,11.825 h1.52
  text "1,200mm (47,24mil)" at 123.691,11.825 h1.52
  text "PTH" at 153.4,11.825 h1.52
  text "Round" at 166.249,11.825 h1.52
  text "Top Layer - Bottom Layer" at 184.888,11.825 h1.52
  text "Pad" at 222.976,11.825 h1.52
  text "(Mixed)" at 237.959,11.825 h1.52
  text "(Mixed)" at 256.902,11.825 h1.52
  text "15" at 109.978,8.015 h1.52
  text "0,508mm (20,00mil)" at 123.691,8.015 h1.52
  text "PTH" at 153.4,8.015 h1.52
  text "Round" at 166.249,8.015 h1.52
  text "Top Layer - Bottom Layer" at 184.888,8.015 h1.52
  text "(Mixed)" at 222.976,8.015 h1.52
  text "Rounded" at 237.959,8.015 h1.52
  text "(Mixed)" at 256.902,8.015 h1.52
  text "43" at 109.978,4.205 h1.52
  text "0,254mm (10,00mil)" at 123.691,4.205 h1.52
  text "PTH" at 153.4,4.205 h1.52
  text "Round" at 166.249,4.205 h1.52
  text "Top Layer - Bottom Layer" at 184.888,4.205 h1.52
  text "Via" at 222.976,4.205 h1.52
  text "Rounded" at 237.959,4.205 h1.52
  text "(Mixed)" at 256.902,4.205 h1.52
  text "72 Total" at 109.978,0.395 h1.52

## Text inside footprints (layer, text, board x,y; h text height)
P1: Bottom Overlay "GPIO" at 7.258,20.55 h0.5; Bottom Overlay "CS" at 6.8,25.575 h0.5; Bottom Overlay "GND" at 19.742,18 h0.5; Bottom Overlay "GPIO" at 19.95,20.458 h0.5; Bottom Overlay "ADC" at 19.742,22.917 h0.5; Bottom Overlay "IC2C" at 19.95,25.375 h0.5; Bottom Overlay "MOSI" at 7.217,23.95 h0.5; Bottom Overlay "MISO" at 7.258,23 h0.5; Bottom Overlay "CLK" at 7.05,21.95 h0.5; Bottom Overlay "BAT" at 7.05,19 h0.5; Bottom Overlay "ANT" at 7.05,17.975 h0.5; Bottom Overlay "DVCC" at 7.3,16.975 h0.5
P2: Top Overlay "DEBUG  / SPI" at 15.775,30.95 h0.8; Top Overlay "MISO" at 20.923,34.218 h1.2 r270; Top Overlay "MOSI" at 23.463,34.118 h1.2 r270; Top Overlay "CLK" at 26.003,33.718 h1.2 r270
P3: Top Overlay "CLK" at 35.503,33.718 h1.2 r270; Top Overlay "MOSI" at 32.963,34.118 h1.2 r270; Top Overlay "MISO" at 30.423,34.218 h1.2 r270
P4: Top Overlay "POWER / TEST" at 7.875,32.3 h0.8